# EAGLE board sch_through_hole_3mm_75mm_component (EAGLE 8.4.3)
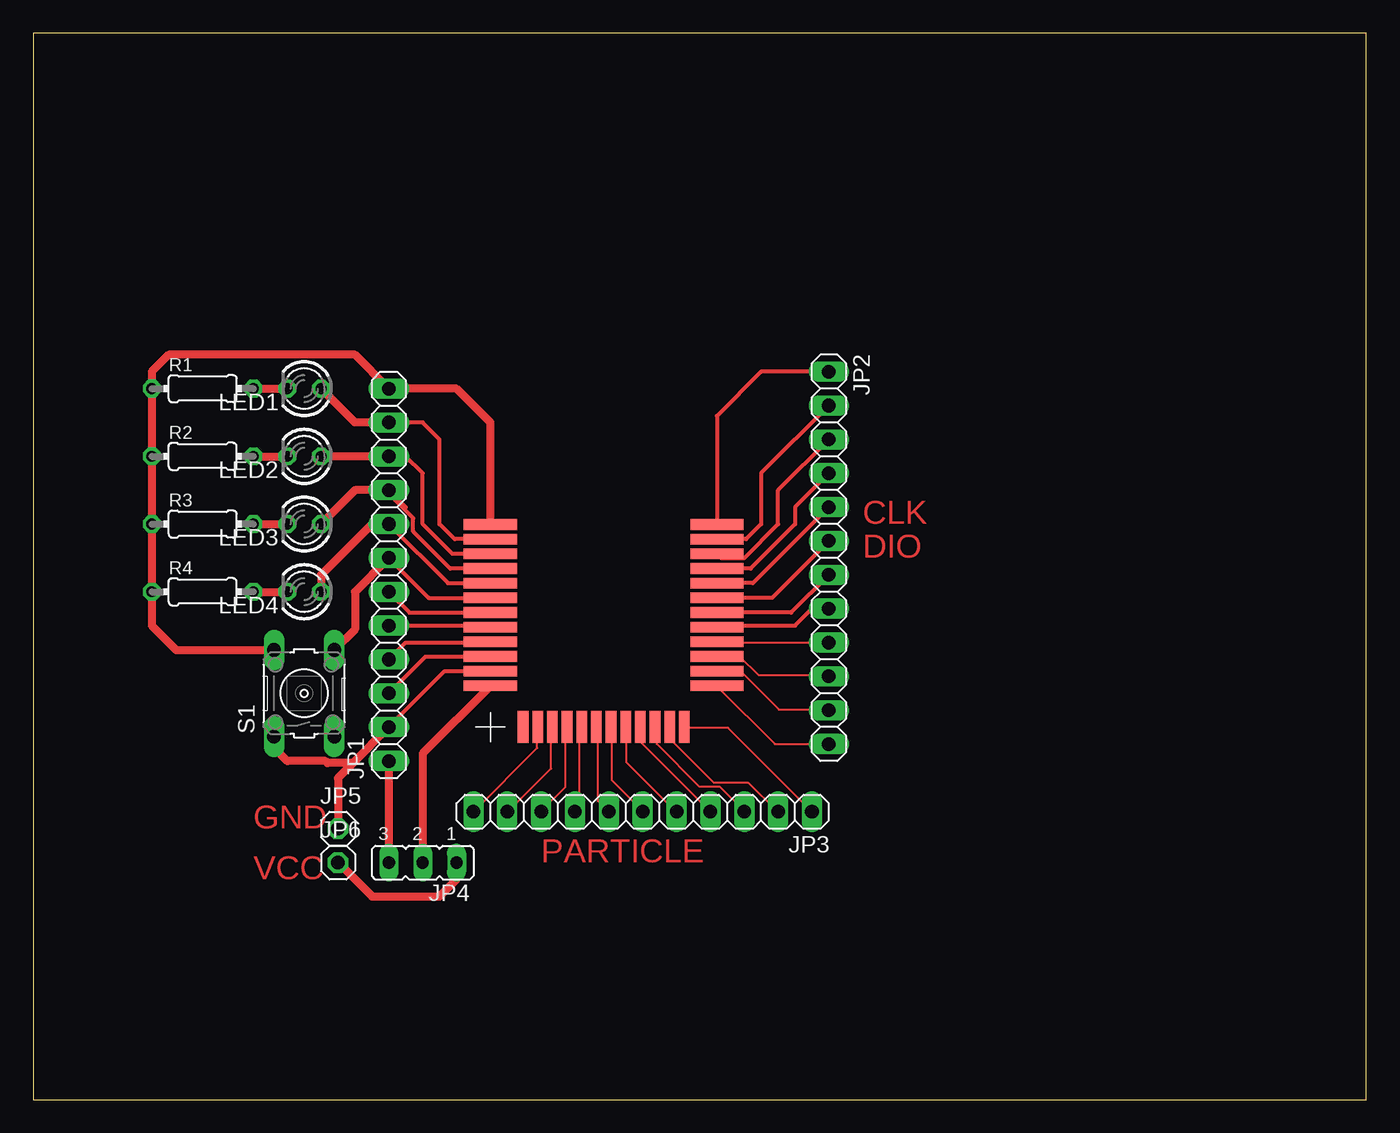
[diagram p0: board, top side]

Size 100 x 80 mm. Coordinates in mm from the lower left corner, seen from the top.
Outline: 0,0 100,0 100,80 0,80 0,0
Copper layers (1*16): Top 0.035mm / dielectric 1.5mm / Bottom 0.035mm
Design rules "default": minimum track width 6mil, minimum drill 0.35mm, track to track 6mil, track to pad 6mil, pad to pad 6mil, via to via 6mil, smd to smd 6mil, copper to edge 40mil, drill to drill 6mil, minimum pad ring 10mil, minimum via ring 8mil, stop-mask expansion 4mil, vias tented up to drill 0mil, thermal gap 10mil

## Footprints (pad centres in the part's own frame; a part is rotated, then mirrored left to right if it is on the bottom)
1X12 = drill 1.016 long: 1 -13.97,0; 2 -11.43,0; 3 -8.89,0; 4 -6.35,0; 5 -3.81,0; 6 -1.27,0; 7 1.27,0; 8 3.81,0; 9 6.35,0; 10 8.89,0; 11 11.43,0; 12 13.97,0
1X11 = drill 1.016 long: 1 -12.7,0; 2 -10.16,0; 3 -7.62,0; 4 -5.08,0; 5 -2.54,0; 6 0,0; 7 2.54,0; 8 5.08,0; 9 7.62,0; 10 10.16,0; 11 12.7,0
JP2 = drill 0.914 long: 1 -2.54,0; 2 0,0; 3 2.54,0
1X01 = drill 1.016 octagon: 1 0,0
LED3MM = drill 0.813 octagon: A -1.27,0; K 1.27,0
0204/7 = drill 0.813 octagon: 1 -3.81,0; 2 3.81,0
B3F-10XX = drill 1.016 long: 1 -3.251,2.261; 2 3.251,2.261; 3 -3.251,-2.261; 4 3.251,-2.261
SMD_PAD_VERSION = smd 4 x 0.8: P$01 0,15.2; P$02 0,14.1; P$03 0,13; P$04 0,11.9; P$05 0,10.8; P$06 0,9.7; P$07 0,8.6; P$08 0,7.5; P$09 0,6.4; P$10 0,5.3; P$11 0,4.2; P$12 0,3.1; P$25 17,3.1; P$26 17,4.2; P$27 17,5.3; P$28 17,6.4; P$29 17,7.5; P$30 17,8.6; P$31 17,9.7; P$32 17,10.8; P$33 17,11.9; P$34 17,13; P$35 17,14.1; P$36 17,15.2 | smd 0.8 x 2.4: P$13 2.45,0; P$14 3.55,0; P$15 4.65,0; P$16 5.75,0; P$17 6.85,0; P$18 7.95,0; P$19 9.05,0; P$20 10.15,0; P$21 11.25,0; P$22 12.35,0; P$23 13.45,0; P$24 14.55,0

## Placement (x,y rotation side)
JP1  [1X12]  26.67,39.37 90 top
JP2  [1X12]  59.69,40.64 270 top
JP3  [1X11]  45.72,21.59 180 top
JP4  [JP2]  29.21,17.78 180 top
JP5  [1X01]  22.86,20.32 0 top
JP6  [1X01]  22.86,17.78 0 top
LED1  RED  [LED3MM]  20.32,53.34 180 top
LED2  GREEN  [LED3MM]  20.32,48.26 180 top
LED3  W  [LED3MM]  20.32,43.18 180 top
LED4  Y  [LED3MM]  20.32,38.1 180 top
R1  1000  [0204/7]  12.7,53.34 0 top
R2  1k  [0204/7]  12.7,48.26 0 top
R3  1k  [0204/7]  12.7,43.18 0 top
R4  1k  [0204/7]  12.7,38.1 0 top
S1  [B3F-10XX]  20.32,30.48 90 top
U$1  HZX_MODULE  [SMD_PAD_VERSION]  34.29,27.94 0 top

## Library data of the parts
JP1 = pinhead; SPICEPREFIX: X
JP2 JP3 JP5 JP6 = pinhead
JP4 = jumper
LED1-LED4 = led
R1-R4 = eagle-ltspice; SPICEMODEL: NONE; SPICEPREFIX: R
S1 = switch-omron; MPN: B3F-1000; OC_FARNELL: 176432; OC_NEWARK: 36M3542
U$1 = HZX_MODULE; AUTHOR: Agam

## Nets
N$1: JP4.2 U$1.P$12
N$3: JP1.3 U$1.P$10
N$4: JP1.4 U$1.P$09
N$5: JP1.5 U$1.P$08
N$6: JP1.6 U$1.P$07
N$7: JP1.7 S1.4 U$1.P$06
N$8: JP1.8 LED4.A U$1.P$05
N$9: JP1.9 LED3.A U$1.P$04
N$10: JP1.10 LED2.A U$1.P$03
N$11: JP1.11 LED1.A U$1.P$02
N$12: JP1.1 JP4.3
N$13: JP2.1 U$1.P$36
N$14: JP2.2 U$1.P$35
N$15: JP2.3 U$1.P$34
N$16: JP2.4 U$1.P$33
N$17: JP2.5 U$1.P$32
N$18: JP2.6 U$1.P$31
N$19: JP2.7 U$1.P$30
N$20: JP2.8 U$1.P$29
N$21: JP2.9 U$1.P$28
N$22: JP2.10 U$1.P$27
N$23: JP2.11 U$1.P$26
N$24: JP2.12 U$1.P$25
N$25: JP3.1 U$1.P$24
N$26: JP3.2 U$1.P$23
N$27: JP3.3 U$1.P$22
N$28: JP3.4 U$1.P$21
N$29: JP3.5 U$1.P$20
N$30: JP3.6 U$1.P$19
N$31: JP3.7 U$1.P$18
N$32: JP3.8 U$1.P$17
N$33: JP3.9 U$1.P$16
N$34: JP3.10 U$1.P$15
N$35: JP3.11 U$1.P$14
N$37: JP1.2 JP5.1 S1.1 U$1.P$11
N$38: JP4.1 JP6.1
N$39: LED1.K R1.2
N$40: LED2.K R2.2
N$41: LED3.K R3.2
N$42: LED4.K R4.2
N$44: JP1.12 R1.1 R2.1 R3.1 R4.1 S1.2 U$1.P$01

## Tracks (layer width: path | path; a pad name or v marks a point on that pad's centre or on a via)
N$1
  Top 0.61: U$1.P$12 29.21,25.96 JP4.2
N$3
  Top 0.305: JP1.3 29.43,33.24 U$1.P$10
N$4
  Top 0.305: JP1.4 27.94,34.29 33.02,34.29 33.07,34.34 U$1.P$09
N$5
  Top 0.305: JP1.5 34.29,35.56 U$1.P$08
N$6
  Top 0.305: JP1.6 28.23,36.54 U$1.P$07
N$7
  Top 0.305: JP1.7 29.67,37.64 U$1.P$06
  Top 0.61: JP1.7 24.13,38.1 24.13,35.28 S1.4
N$8
  Top 0.305: JP1.8 31.11,38.74 U$1.P$05
  Top 0.61: JP1.8 25.4,43.18 21.59,39.37 LED4.A
N$9
  Top 0.305: 27.94,44.45 JP1.9 26.67,45.45 28.5,43.62 28.5,42.62 31.28,39.84 U$1.P$04
  Top 0.61: JP1.9 24.13,45.72 LED3.A
N$10
  Top 0.305: U$1.P$03 31.45,40.94 29.21,43.18 29.21,46.99 27.94,48.26 JP1.10
  Top 0.61: JP1.10 LED2.A
N$11
  Top 0.305: U$1.P$02 31.62,42.04 30.48,43.18 30.48,49.53 29.21,50.8 JP1.11
  Top 0.61: LED1.A 24.13,50.8 JP1.11
N$12
  Top 0.61: JP1.1 JP4.3
N$13
  Top 0.305: JP2.1 54.61,54.61 51.29,51.29 U$1.P$36
N$14
  Top 0.305: JP2.2 54.61,46.99 54.61,43.18 53.47,42.04 U$1.P$35
N$15
  Top 0.305: JP2.3 55.88,45.72 55.88,43.18 53.34,40.64 51.59,40.64 U$1.P$34
N$16
  Top 0.305: JP2.4 57.15,44.45 57.15,43.18 53.81,39.84 U$1.P$33
N$17
  Top 0.152: 58.67,44.35 59.59,44.35 JP2.5 | 53.19,38.86 51.36,38.86 U$1.P$32
  Top 0.305: JP2.5 53.98,38.74 U$1.P$32
N$18
  Top 0.305: JP2.6 55.42,37.64 U$1.P$31
N$19
  Top 0.305: JP2.7 56.86,36.54 U$1.P$30
N$20
  Top 0.305: U$1.P$29 51.41,35.56 57.15,35.56 58.42,36.83 JP2.8
N$21
  Top 0.152: JP2.9 51.36,34.29 U$1.P$28
N$22
  Top 0.152: JP2.10 59.59,31.85 54.41,31.85 53.03,33.22 51.36,33.22 U$1.P$27
N$23
  Top 0.152: JP2.11 59.59,29.26 55.93,29.26 53.19,32 51.36,32 U$1.P$26
N$24
  Top 0.152: JP2.12 55.63,26.67 51.36,30.94 U$1.P$25
N$25
  Top 0.152: JP3.1 52.12,27.89 48.92,27.89 U$1.P$24
N$26
  Top 0.152: U$1.P$23 47.85,27.89 47.85,26.98 51.05,23.77 53.65,23.77 55.78,21.64 JP3.2
N$27
  Top 0.152: U$1.P$22 46.79,27.89 46.79,26.67 49.99,23.47 51.51,23.47 53.34,21.64 JP3.3
N$28
  Top 0.152: JP3.4 45.57,26.82 45.57,27.89 U$1.P$21
N$29
  Top 0.152: U$1.P$20 44.5,27.89 44.5,25.3 48.16,21.64 JP3.5
N$30
  Top 0.152: U$1.P$19 43.43,27.89 43.43,23.93 45.72,21.64 JP3.6
N$31
  Top 0.152: JP3.7 42.37,22.4 42.37,27.89 U$1.P$18
N$32
  Top 0.152: JP3.8 41,21.95 41,27.89 U$1.P$17
N$33
  Top 0.152: U$1.P$16 39.93,27.89 39.93,23.47 38.1,21.64 JP3.9
N$34
  Top 0.152: U$1.P$15 38.86,27.89 38.86,24.84 35.66,21.64 JP3.10
N$35
  Top 0.152: JP3.11 37.8,26.36 37.8,27.89 U$1.P$14
N$37
  Top 0.305: JP1.2 30.87,32.14 U$1.P$11
  Top 0.61: 23.98,25.25 JP1.2 | 23.98,25.25 22.08,25.25 21.92,25.4 19.05,25.4 18.06,26.39 S1.1 | 23.98,25.25 22.86,24.13 JP5.1
N$38
  Top 0.61: JP6.1 25.4,15.24 30.48,15.24 31.75,16.51 JP4.1
N$39
  Top 0.61: R1.2 LED1.K
N$40
  Top 0.61: R2.2 LED2.K
N$41
  Top 0.61: R3.2 LED3.K
N$42
  Top 0.61: R4.2 LED4.K
N$44
  Top 0.61: U$1.P$01 34.29,50.8 31.75,53.34 JP1.12 24.13,55.88 10.16,55.88 8.89,54.61 R1.1 R2.1 R3.1 R4.1 8.89,35.56 10.72,33.73 S1.2

## Text on the board
Top: CLK | DIO | GND | PARTICLE | VCC